# Altium PCB MB.PcbDoc
Units mil, origin at the board's own origin, x right, y up, seen from the top; angles counter-clockwise.
Board outline 4133.86 x 4921.26 mil, 4 copper layers (Digital Layer, nMO Layer, MO Layer, GND Layer), stack 39.843 mil thick; 61 components, 78 nets, 387 pads, 0 vias.
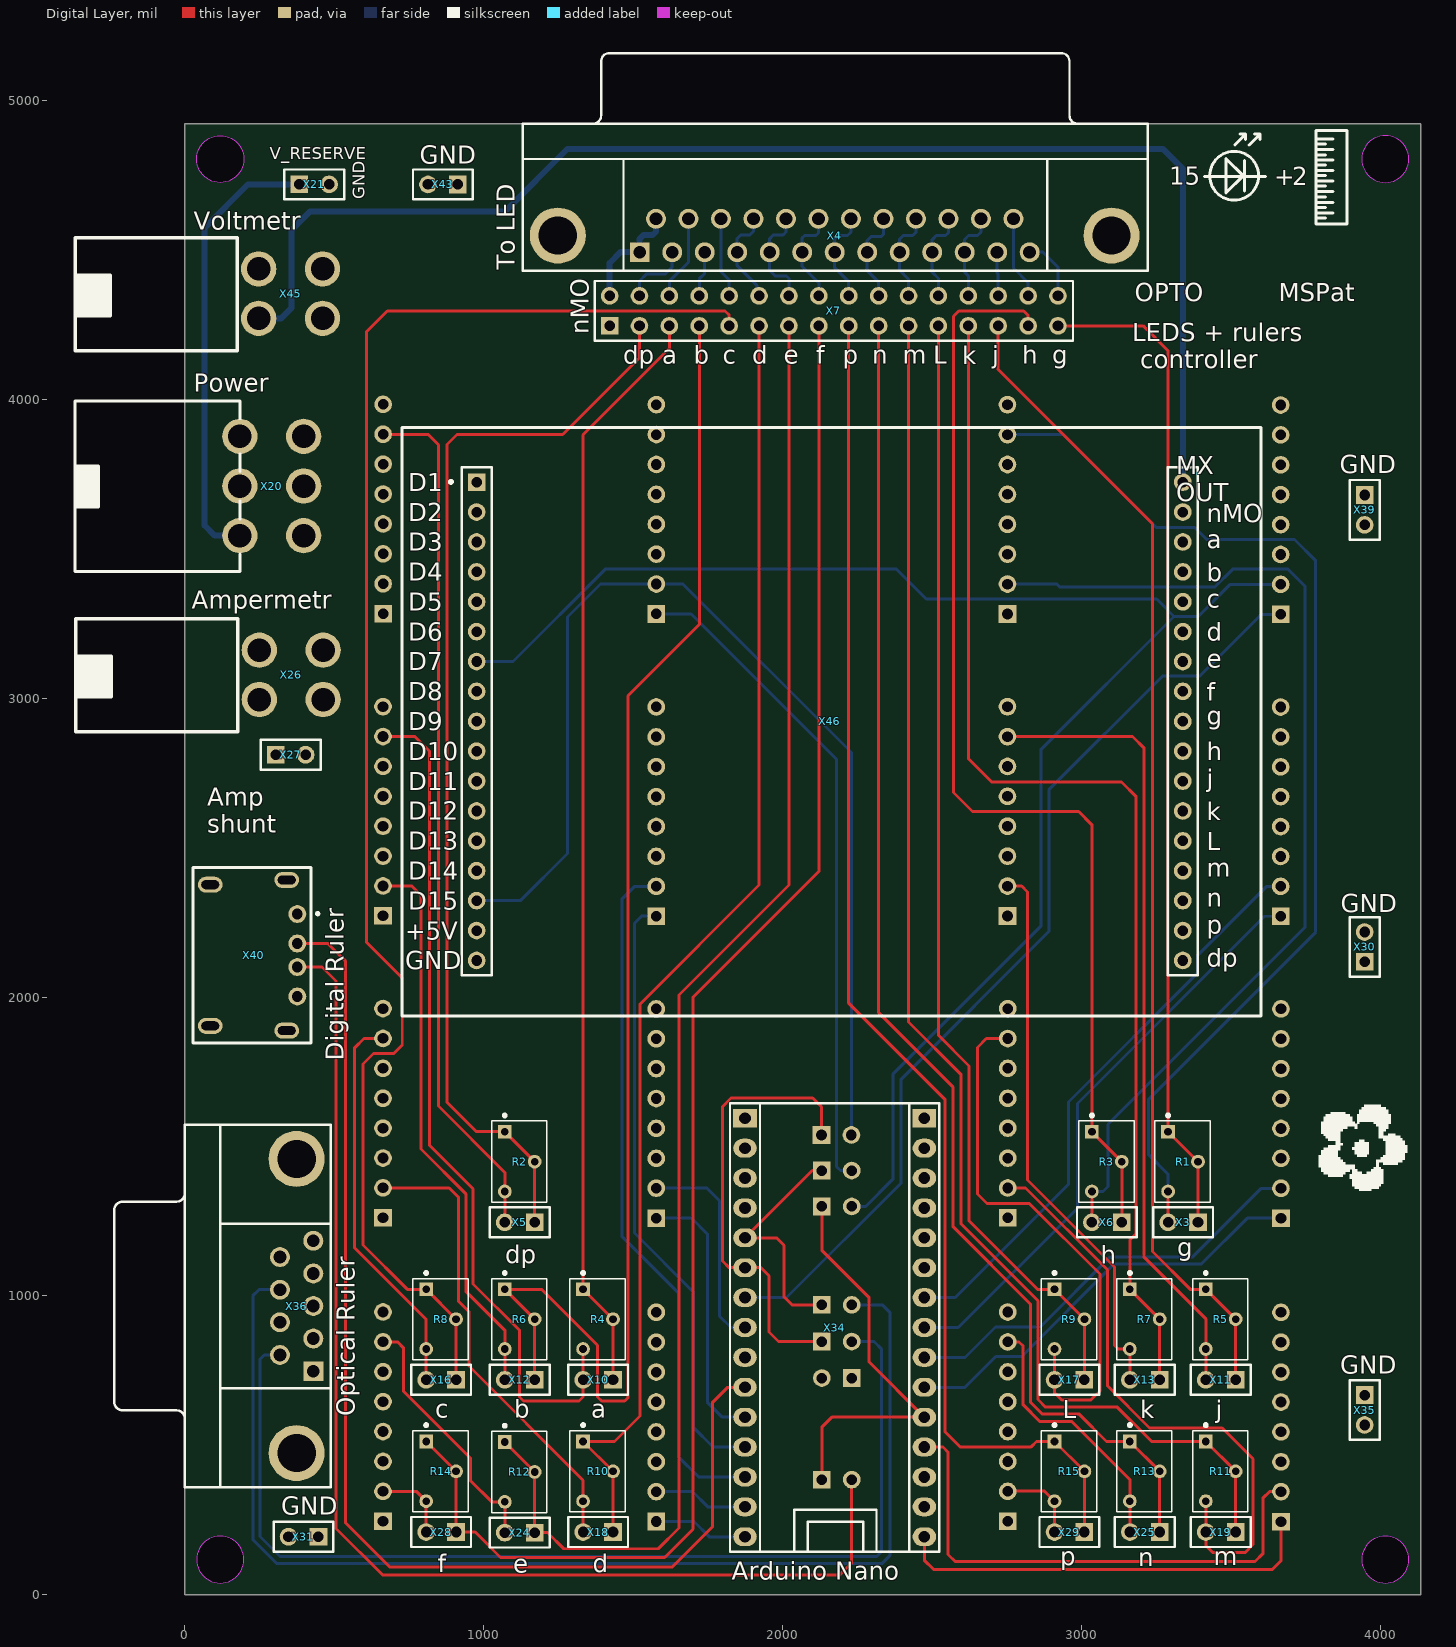
[diagram p0: Digital Layer view]
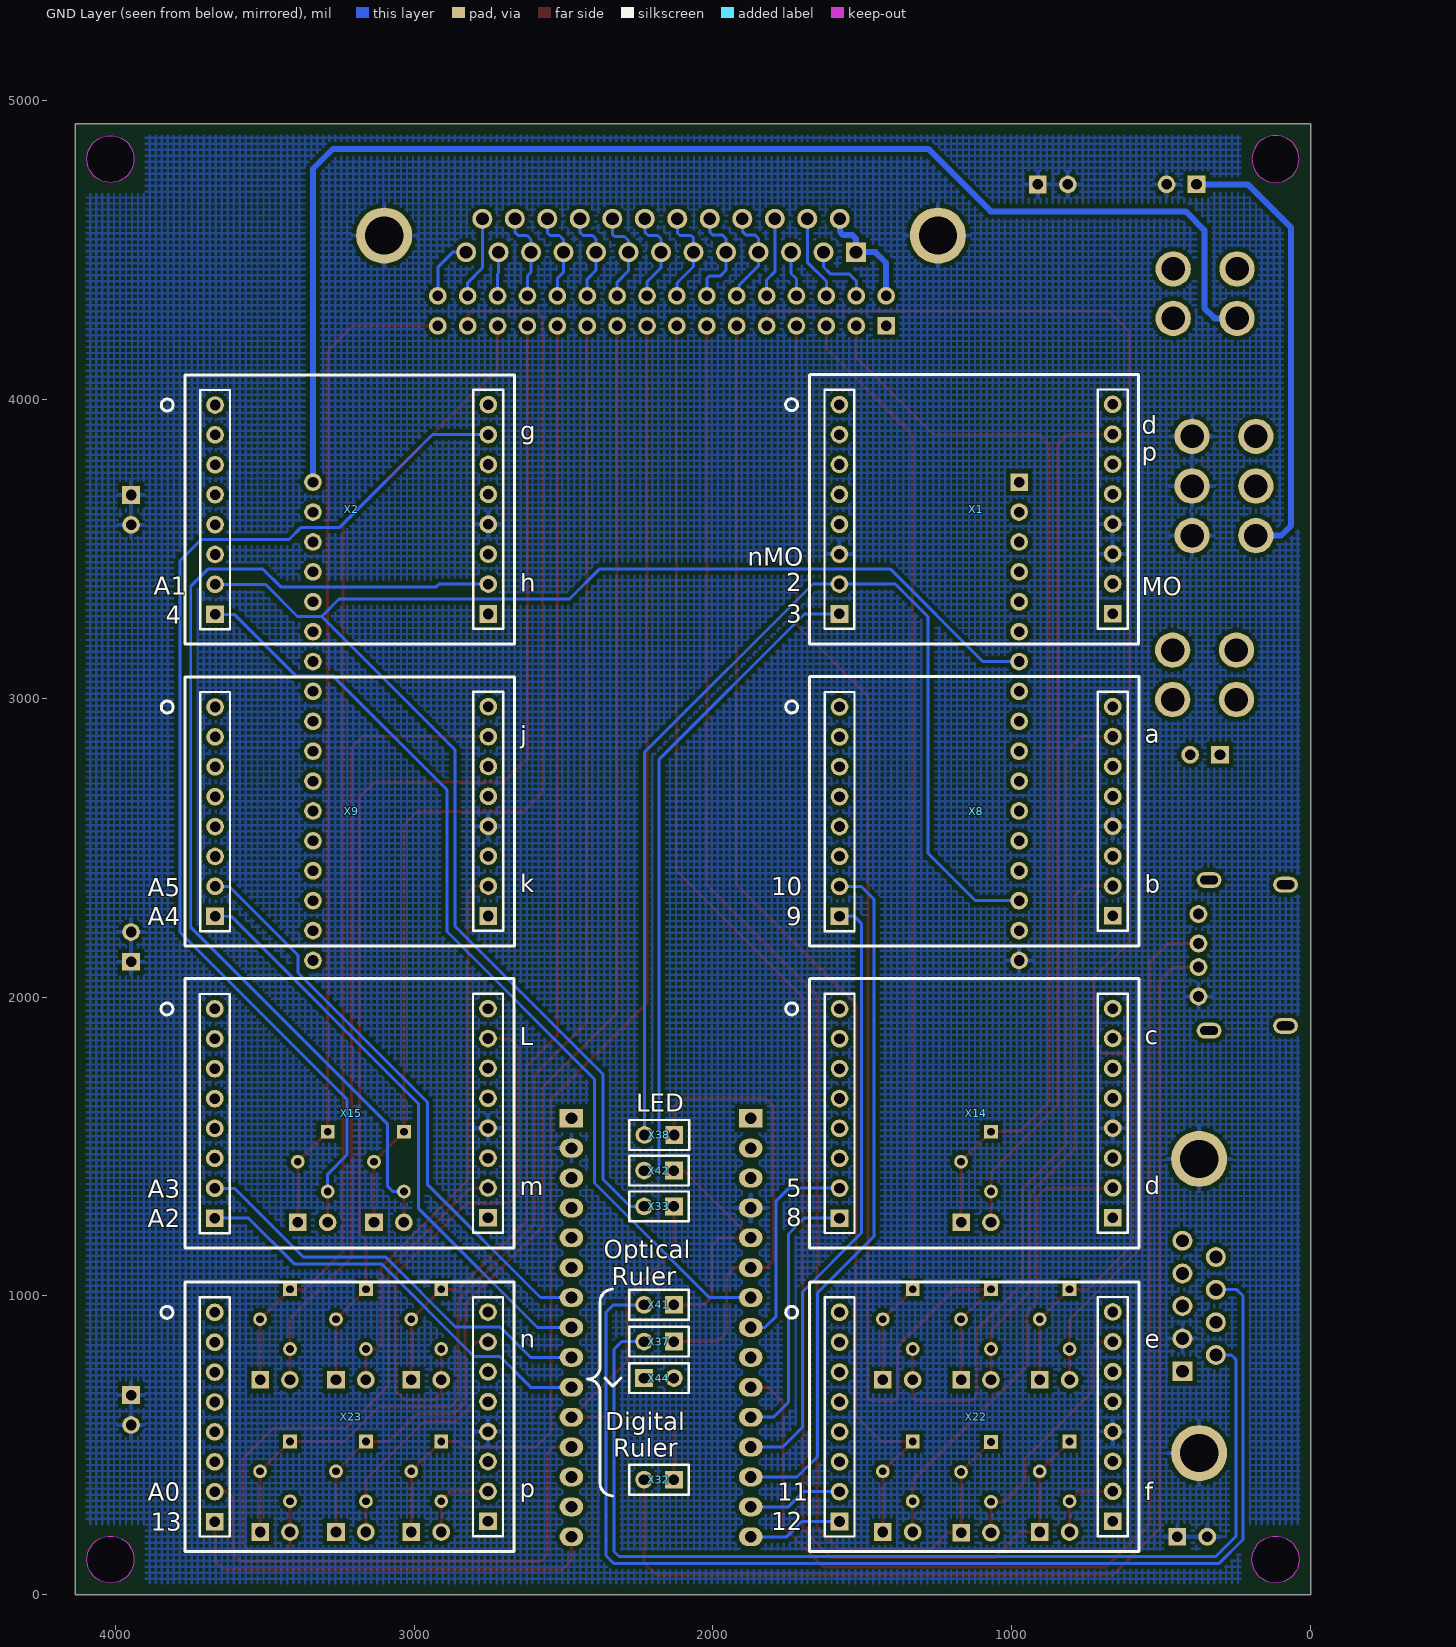
[diagram p1: GND Layer view, seen from below]
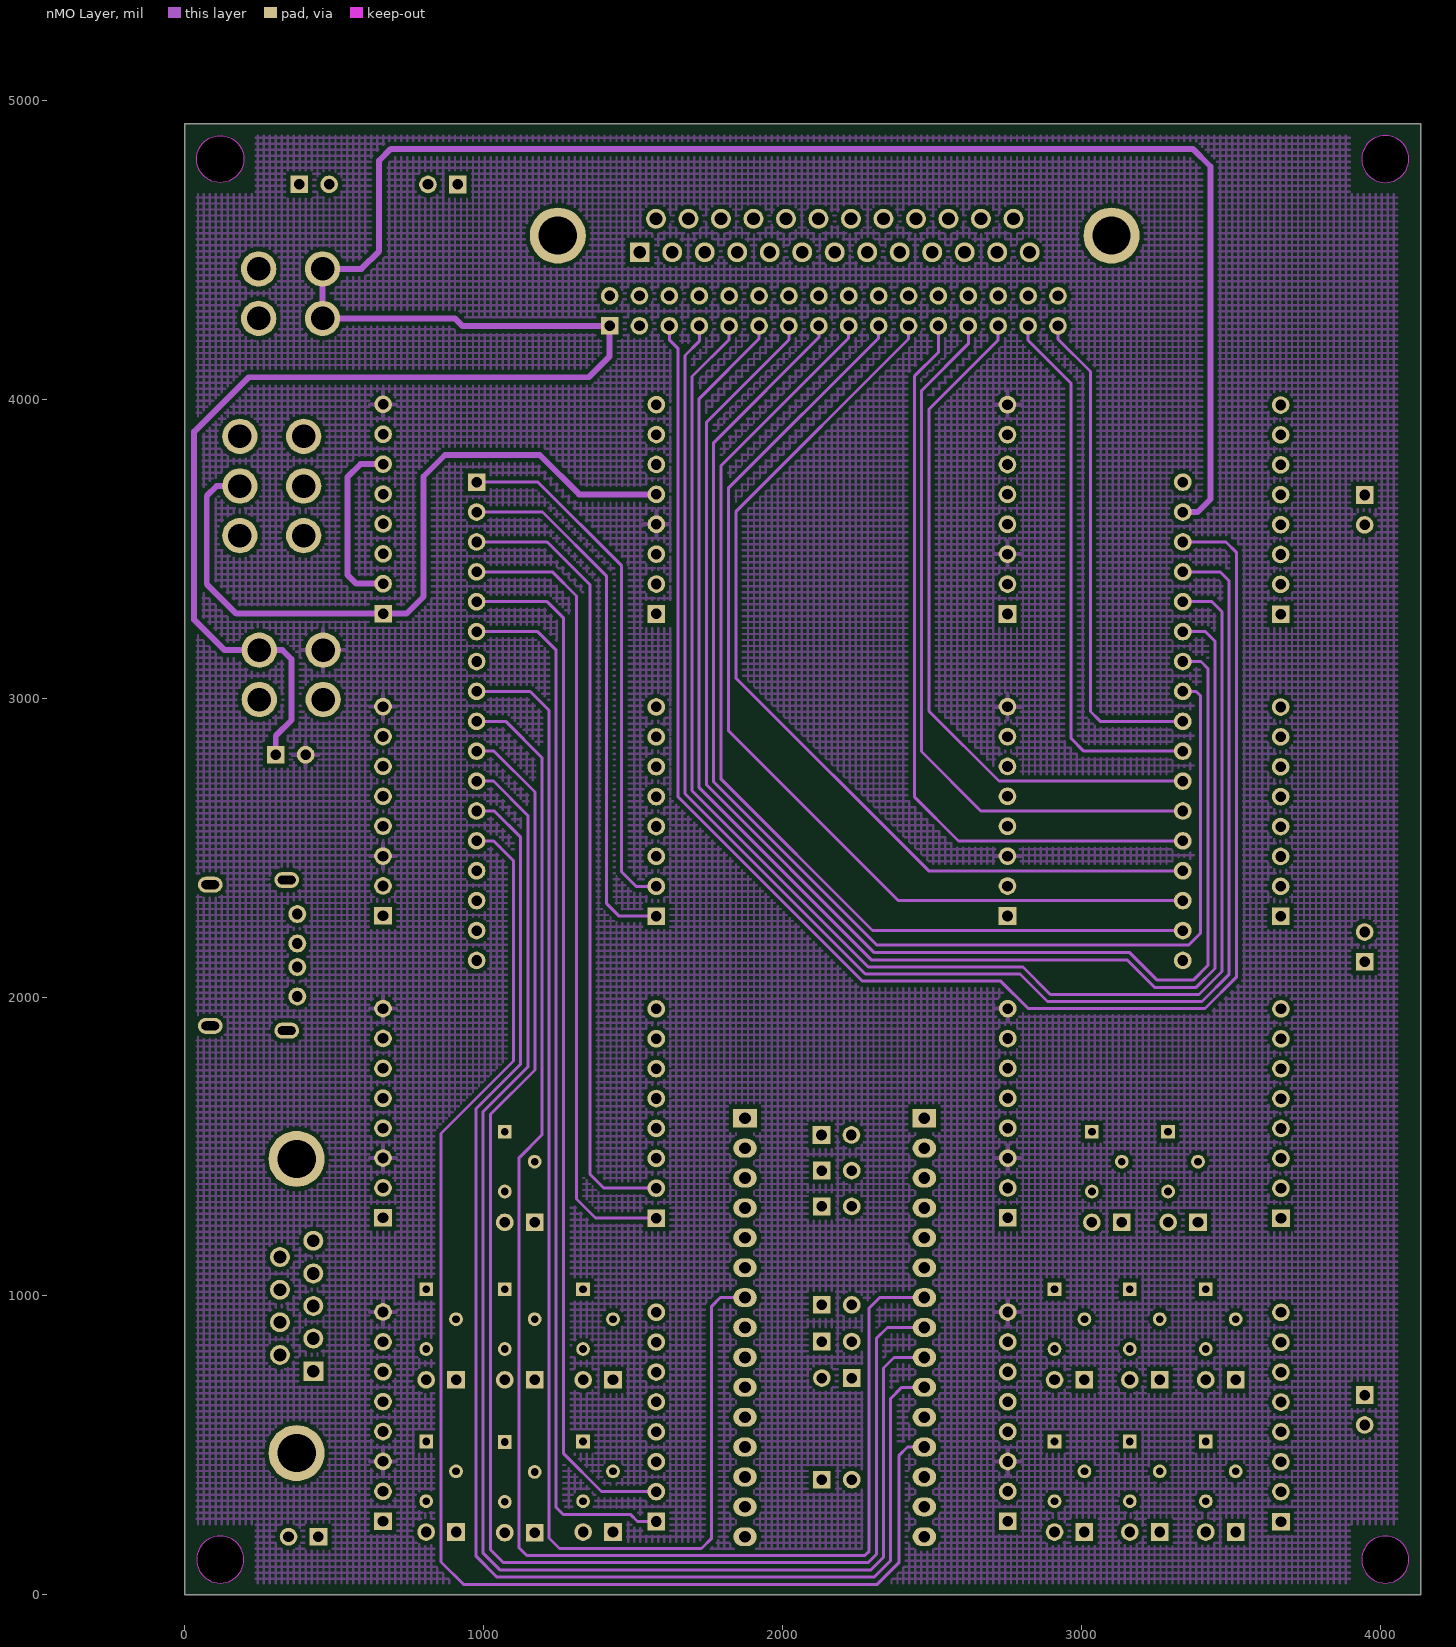
[diagram p2: nMO Layer]
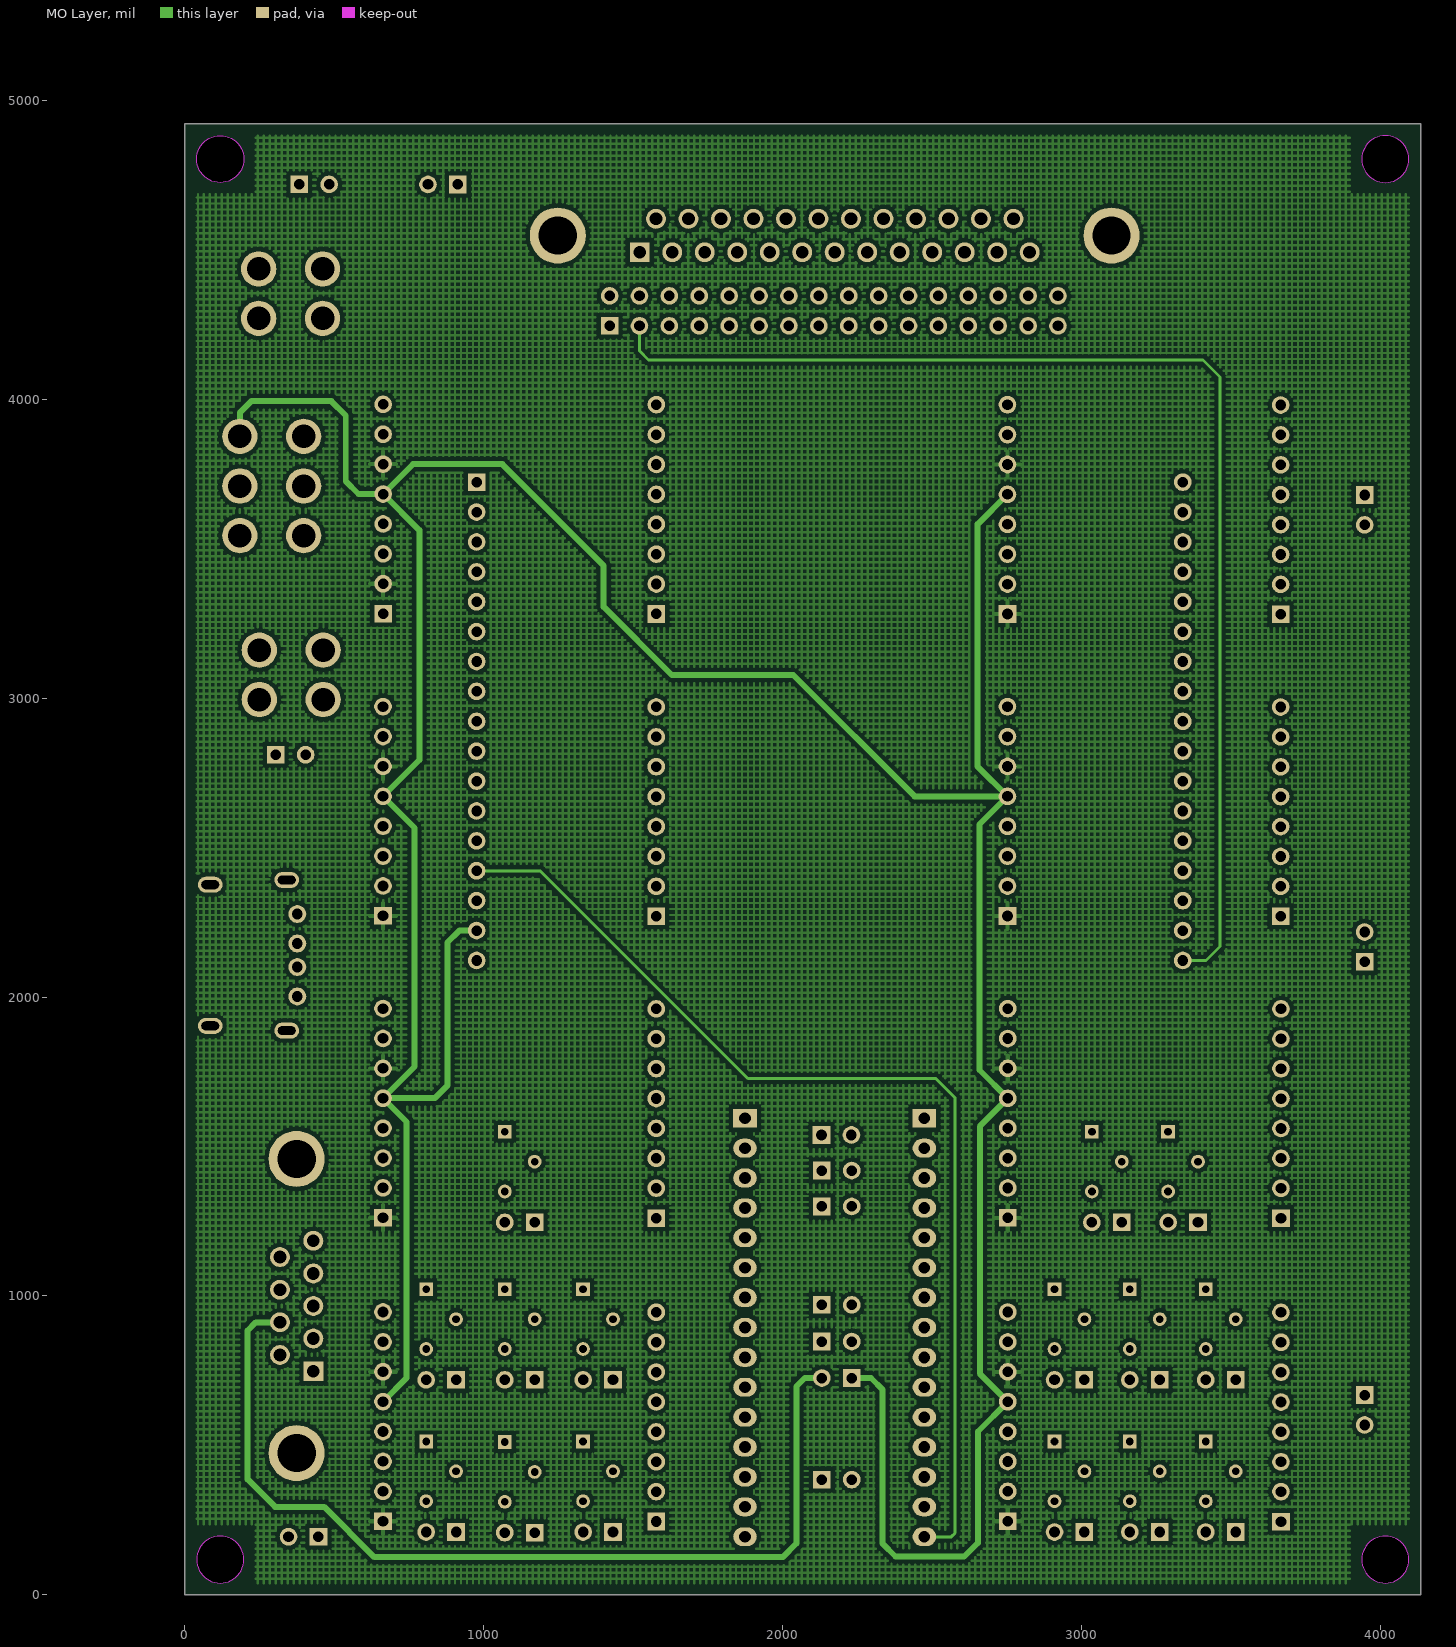
[diagram p3: MO Layer]

## Layer stack, top to bottom
Top Solder: solder mask 1, SM-001, Dk 4
Digital Layer: signal copper 0.7087
Dielectric 1: prepreg 4.5276, FR4 PR, Dk 4.2
nMO Layer: signal copper 0.7087
Dielectric 2: core 27.9528, FR4 Tg150, Dk 4.6
MO Layer: signal copper 0.7087
Dielectric 3: prepreg 4.5276, FR4 PR, Dk 4.2
GND Layer: signal copper 0.7087
Bottom Solder: solder mask 1, SM-001, Dk 4

## Board outline
0,4921.26 4133.86,4921.26 4133.86,0 0,0
cut-out: 3937.01,118.11 ccw(c4015.75,118.11) 4015.75,39.37 ccw(c4015.75,118.11) 4094.49,118.11 ccw(c4015.75,118.11) 4015.75,196.85 ccw(c4015.75,118.11)
cut-out: 3937.01,4803.15 ccw(c4015.75,4803.15) 4015.75,4724.41 ccw(c4015.75,4803.15) 4094.49,4803.15 ccw(c4015.75,4803.15) 4015.75,4881.89 ccw(c4015.75,4803.15)
cut-out: 118.11,4724.41 cw(c118.11,4803.15) 39.37,4803.15 cw(c118.11,4803.15) 118.11,4881.89 cw(c118.11,4803.15) 196.85,4803.15 cw(c118.11,4803.15)
cut-out: 39.37,118.11 ccw(c118.11,118.11) 118.11,39.37 ccw(c118.11,118.11) 196.85,118.11 ccw(c118.11,118.11) 118.11,196.85 ccw(c118.11,118.11)

## Design rules (kind name [scope] priority, off if disabled: settings)
AcuteAngle [All] p1: minimum=3.50000000000000E+0001 checktracksonly=FALSE
BoardOutlineClearance "BoardOutlineClearance 1" [All] p1: gap=9.84 ignorepadtopadclearanceinfootprint=FALSE except(0: Arc-SplitContinuation Track-SplitContinuation SMDPad-SplitContinuation THPad-SplitContinuation Via-SplitContinuation Fill-SplitContinuation Poly-SplitContinuation Region-SplitContinuation Text-SplitContinuation) // Milling
BoardOutlineClearance "BoardOutlineClearance 2" [All] p2: gap=15.75 ignorepadtopadclearanceinfootprint=FALSE except(0: Arc-SplitContinuation Track-SplitContinuation SMDPad-SplitContinuation THPad-SplitContinuation Via-SplitContinuation Fill-SplitContinuation Poly-SplitContinuation Region-SplitContinuation Text-SplitContinuation) // V-Cut
Clearance "Clearance 3 Oz" [All] p1: gap=13.78 ignorepadtopadclearanceinfootprint=FALSE except(9.84: Arc-Hole Track-Hole SMDPad-Hole THPad-Hole Via-Hole Fill-Hole Poly-Hole Region-Hole Text-Hole)
Clearance "Clearance 2 Oz" [All] p2: gap=11.81 ignorepadtopadclearanceinfootprint=FALSE except(9.84: Arc-Hole Track-Hole SMDPad-Hole THPad-Hole Via-Hole Fill-Hole Poly-Hole Region-Hole Text-Hole)
Clearance "Clearance-1 1 Oz" [All] p3: gap=7.87 ignorepadtopadclearanceinfootprint=FALSE except(9.84: Arc-Hole Track-Hole SMDPad-Hole THPad-Hole Via-Hole Fill-Hole Poly-Hole Region-Hole Text-Hole) // Standart
Clearance "Clearance-2 1 Oz" [All] p4: gap=5.91 ignorepadtopadclearanceinfootprint=FALSE except(7.87: Arc-Fill Arc-Poly Track-Fill Track-Poly SMDPad-Fill SMDPad-Poly THPad-Fill THPad-Poly Via-Fill Via-Poly Fill-Fill Fill-Poly Poly-Poly; 9.84: Arc-Hole Track-Hole SMDPad-Hole THPad-Hole Via-Hole Fill-Hole Poly-Hole Region-Hole Text-Hole) // Advance
Clearance "Clearance-1 1/2 Oz" [All] p5: gap=4.92 ignorepadtopadclearanceinfootprint=FALSE except(7.87: Arc-Fill Arc-Poly Track-Fill Track-Poly SMDPad-SMDPad SMDPad-Fill SMDPad-Poly THPad-Fill THPad-Poly Via-Fill Via-Poly Fill-Fill Fill-Poly Poly-Poly Poly-Region Poly-Text; 9.84: Arc-Hole Track-Hole SMDPad-Hole THPad-Hole Via-Hole Fill-Hole Poly-Hole Region-Hole Text-Hole) // Standart
Clearance "Clearance-2 1/2 Oz" [All] p6: gap=3.94 ignorepadtopadclearanceinfootprint=FALSE except(5.91: Arc-Fill Arc-Poly Track-Fill Track-Poly SMDPad-SMDPad SMDPad-Fill SMDPad-Poly THPad-Fill THPad-Poly Via-Fill Via-Poly Fill-Fill Fill-Poly Poly-Poly Poly-Region Poly-Text; 9.84: Arc-Hole Track-Hole SMDPad-Hole THPad-Hole Via-Hole Fill-Hole Poly-Hole Region-Hole Text-Hole) // Advance
DiffPairsRouting "DiffPairsRouting 1 Oz" [All] p1: maxlimit=10 minlimit=7.87 mostfreqgap=10 toplayer_minwidth=7.87 toplayer_maxwidth=15 toplayer_prefwidth=15 midlayer1_minwidth=7.87 midlayer1_maxwidth=15 midlayer1_prefwidth=15 midlayer2_minwidth=7.87 midlayer2_maxwidth=15 midlayer2_prefwidth=15 bottomlayer_minwidth=7.87 bottomlayer_maxwidth=15 bottomlayer_prefwidth=15 maxuncoupledlength=500
DiffPairsRouting "DiffPairsRouting 1/2 Oz" [All] p2: maxlimit=10 minlimit=3.94 mostfreqgap=10 toplayer_minwidth=3.94 toplayer_maxwidth=15 toplayer_prefwidth=15 midlayer1_minwidth=3.94 midlayer1_maxwidth=15 midlayer1_prefwidth=15 midlayer2_minwidth=3.94 midlayer2_maxwidth=15 midlayer2_prefwidth=15 bottomlayer_minwidth=3.94 bottomlayer_maxwidth=15 bottomlayer_prefwidth=15 maxuncoupledlength=500
HoleSize "Minimum HoleSize" [IsPad] p1: absolutevalues=TRUE maxlimit=232.28 minlimit=23.62 maxpercent=80.000 minpercent=20.000
HoleSize "Minimum HoleSize VIA 1" [IsVia] p2: absolutevalues=TRUE maxlimit=232.28 minlimit=11.81 maxpercent=80.000 minpercent=20.000 // Standart
HoleSize "Minimum HoleSize VIA 2" [IsVia] p3: absolutevalues=TRUE maxlimit=232.28 minlimit=7.87 maxpercent=80.000 minpercent=20.000 // Advance
HoleToHoleClearance Hole2HoleClearance [All] p1: gap=9.84 allowstackedmicrovias=FALSE
MinimumAnnularRing "Minimum AR VIA Standart" [IsVia] p1: minimumring=5.91
MinimumAnnularRing "Minimum AR PAD Standart" [IsPAD] p2: minimumring=7.87
MinimumAnnularRing "Minimum AR VIA Advance" [IsVia] p3: minimumring=3.94
MinimumAnnularRing "Minimum AR PAD Advance" [IsPAD] p4: minimumring=5.91
MinimumSolderMaskSliver "SolderMask Bridge Standart" [All] p1: minsoldermaskwidth=5.91 // All Masks
MinimumSolderMaskSliver "SolderMask Bridge Advance" [All] p2: minsoldermaskwidth=3.94 // Mask LDI
PlaneClearance "PlaneClearance 3 Oz" [All] p1: clearance=13.78
PlaneClearance "PlaneClearance 2 Oz" [All] p2: clearance=11.81
PlaneClearance "PlaneClearance 1 Oz" [All] p3: clearance=7.87
PlaneClearance "PlaneClearance-1 1/2 Oz" [All] p4: clearance=7.87 // Standart
PlaneClearance "PlaneClearance-2 1/2 Oz" [All] p5: clearance=5.91 // Advance
PlaneConnect "TermalConnect 3 Oz" [All] p1: planeconnectstyle=Relief reliefexpansion=7.87 reliefentries=4 reliefconductorwidth=13.78 reliefairgap=13.78 // Standart
PlaneConnect "TermalConnect 2 Oz" [All] p2: planeconnectstyle=Relief reliefexpansion=7.87 reliefentries=4 reliefconductorwidth=11.81 reliefairgap=11.81 // Standart
PlaneConnect "TermalConnect-1 1 Oz" [All] p3: planeconnectstyle=Relief reliefexpansion=7.87 reliefentries=4 reliefconductorwidth=7.87 reliefairgap=7.87 // Standart
PlaneConnect "TermalConnect-2 1 Oz" [All] p4: pad.planeconnectstyle=Relief pad.reliefexpansion=5.91 pad.reliefentries=4 pad.reliefconductorwidth=7.87 pad.reliefairgap=7.87 via.planeconnectstyle=Direct via.reliefexpansion=5.91 via.reliefentries=4 via.reliefconductorwidth=5.91 via.reliefairgap=5.91 // Advance
PlaneConnect "TermalConnect-1 1/2 Oz" [All] p5: planeconnectstyle=Relief reliefexpansion=7.87 reliefentries=4 reliefconductorwidth=7.87 reliefairgap=7.87 // Standart
PlaneConnect "TermalConnect-2 1/2 Oz" [All] p6: pad.planeconnectstyle=Relief pad.reliefexpansion=5.91 pad.reliefentries=4 pad.reliefconductorwidth=5.91 pad.reliefairgap=5.91 via.planeconnectstyle=Direct via.reliefexpansion=5.91 via.reliefentries=4 via.reliefconductorwidth=5.91 via.reliefairgap=5.91 // Advance
PolygonConnect "PolygonConnect 3 Oz" [All] p1: thpad.connectstyle=Relief thpad.reliefconductorwidth=13.78 thpad.reliefentries=4 thpad.polygonreliefangle="90 Angle" thpad.airgapwidth=13.78 smdpad.connectstyle=Relief smdpad.reliefconductorwidth=13.78 smdpad.reliefentries=4 smdpad.polygonreliefangle="90 Angle" smdpad.airgapwidth=13.78 via.connectstyle=Direct via.reliefconductorwidth=10 via.reliefentries=4 via.polygonreliefangle="90 Angle" via.airgapwidth=10
PolygonConnect "PolygonConnect 2 Oz" [All] p2: thpad.connectstyle=Relief thpad.reliefconductorwidth=11.81 thpad.reliefentries=4 thpad.polygonreliefangle="90 Angle" thpad.airgapwidth=11.81 smdpad.connectstyle=Relief smdpad.reliefconductorwidth=11.81 smdpad.reliefentries=4 smdpad.polygonreliefangle="90 Angle" smdpad.airgapwidth=11.81 via.connectstyle=Direct via.reliefconductorwidth=10 via.reliefentries=4 via.polygonreliefangle="90 Angle" via.airgapwidth=10
PolygonConnect "PolygonConnect-1 1 Oz" [All] p3: thpad.connectstyle=Relief thpad.reliefconductorwidth=7.87 thpad.reliefentries=4 thpad.polygonreliefangle="90 Angle" thpad.airgapwidth=7.87 smdpad.connectstyle=Relief smdpad.reliefconductorwidth=7.87 smdpad.reliefentries=4 smdpad.polygonreliefangle="90 Angle" smdpad.airgapwidth=7.87 via.connectstyle=Direct via.reliefconductorwidth=10 via.reliefentries=4 via.polygonreliefangle="90 Angle" via.airgapwidth=10 // Standart
PolygonConnect "PolygonConnect-2 1 Oz" [All] p4: thpad.connectstyle=Relief thpad.reliefconductorwidth=5.91 thpad.reliefentries=4 thpad.polygonreliefangle="90 Angle" thpad.airgapwidth=5.91 smdpad.connectstyle=Relief smdpad.reliefconductorwidth=5.91 smdpad.reliefentries=4 smdpad.polygonreliefangle="90 Angle" smdpad.airgapwidth=5.91 via.connectstyle=Direct via.reliefconductorwidth=10 via.reliefentries=4 via.polygonreliefangle="90 Angle" via.airgapwidth=10 // Advance
PolygonConnect "PolygonConnect-1 1/2 Oz" [All] p5: thpad.connectstyle=Relief thpad.reliefconductorwidth=5.91 thpad.reliefentries=4 thpad.polygonreliefangle="90 Angle" thpad.airgapwidth=7.87 smdpad.connectstyle=Relief smdpad.reliefconductorwidth=7.87 smdpad.reliefentries=4 smdpad.polygonreliefangle="90 Angle" smdpad.airgapwidth=7.87 via.connectstyle=Direct via.reliefconductorwidth=10 via.reliefentries=4 via.polygonreliefangle="90 Angle" via.airgapwidth=10 // Standart
PolygonConnect "PolygonConnect-2 1/2 Oz" [All] p6: thpad.connectstyle=Relief thpad.reliefconductorwidth=4.92 thpad.reliefentries=4 thpad.polygonreliefangle="90 Angle" thpad.airgapwidth=5.91 smdpad.connectstyle=Relief smdpad.reliefconductorwidth=4.92 smdpad.reliefentries=4 smdpad.polygonreliefangle="90 Angle" smdpad.airgapwidth=5.91 via.connectstyle=Direct via.reliefconductorwidth=10 via.reliefentries=4 via.polygonreliefangle="90 Angle" via.airgapwidth=10 // Advance
RoutingCorners [All] p1 off: cornerstyle=45-Degree minsetback=100 maxsetback=100
RoutingVias [All] p1: holewidth=11.81 width=23.62 viastyle="Through Hole" minholewidth=7.87 minwidth=15.75 maxholewidth=232.28 maxwidth=251.97
SilkToSilkClearance Silk2SilkClearance [All] p1 off: silktosilkclearance=5.91
SilkToSolderMaskClearance Silk2SolderMaskClearance [IsPad] p1 off: minsilkscreentomaskgap=5.91 clearancetoexposedcopper=TRUE
SolderMaskExpansion SolderMaskExpansion-1 [All] p1: expansion=1.97 istentingtop=FALSE // Standart
SolderMaskExpansion "SolderMaskExpansion LDI" [All] p2: expansion=0.98 istentingtop=FALSE // Advance
UnRoutedNet [All] p1: checkbadconnections=TRUE
Width "Width 3 Oz" [All] p1: maxlimit=20 minlimit=10 preferedwidth=10 checkconnectedcopper=TRUE
Width "Width 2 Oz" [All] p2: maxlimit=393.7 minlimit=10 preferedwidth=10 minimp=50.000000 maximp=50.000000 favimp=50.000000 checkconnectedcopper=TRUE
Width "Width 1 Oz" [All] p3: maxlimit=20 minlimit=10 preferedwidth=10 checkconnectedcopper=TRUE
Width "Width 1/2 Oz" [All] p4: maxlimit=20 minlimit=10 preferedwidth=10 checkconnectedcopper=TRUE
20 further rules are at their usual default settings.

## Components (designator, comment, footprint, x,y, rotation, side; value= is the part's Value field where it differs from the comment)
R1 "RES 3266W" "RES 3266W" 3289,1549.37 r270 top
R2 "RES 3266W" "RES 3266W" 1070,1549.37 r270 top
R3 "RES 3266W" "RES 3266W" 3034,1549.37 r270 top
R4 "RES 3266W" "RES 3266W" 1332,1022.37 r270 top
R5 "RES 3266W" "RES 3266W" 3415,1022.37 r270 top
R6 "RES 3266W" "RES 3266W" 1070,1022.37 r270 top
R7 "RES 3266W" "RES 3266W" 3161,1022.37 r270 top
R8 "RES 3266W" "RES 3266W" 807,1022.37 r270 top
R9 "RES 3266W" "RES 3266W" 2909,1022.37 r270 top
R10 "RES 3266W" "RES 3266W" 1332,513.37 r270 top
R11 "RES 3266W" "RES 3266W" 3415,513.37 r270 top
R12 "RES 3266W" "RES 3266W" 1070,511.37 r270 top
R13 "RES 3266W" "RES 3266W" 3161,513.37 r270 top
R14 "RES 3266W" "RES 3266W" 807,513.37 r270 top
R15 "RES 3266W" "RES 3266W" 2909,513.37 r270 top
X1 "MEZ_RELAY" MEZ_RELAY 1576.98,3981.6 r180 bottom
X2 "MEZ_RELAY" MEZ_RELAY 3665.62,3980.49 r180 bottom
X3 "GND" HDR1X2 3389,1246.37 r180 top
X4 "D Connector 25" DSUB1.385-2H25A 2173.62,4921.49 r0 top
X5 "GND" HDR1X2 1170,1246.37 r180 top
X6 "GND" HDR1X2 3134,1246.37 r180 top
X7 "Header 16X2" HDR2X16 1420.62,4245.49 r0 top
X8 "MEZ_RELAY" MEZ_RELAY 1576.62,2970.49 r180 bottom
X9 "MEZ_RELAY" MEZ_RELAY 3665.62,2970.24 r180 bottom
X10 "Header 2" HDR1X2 1432,719.37 r180 top
X11 "Header 2" HDR1X2 3515,719.37 r180 top
X12 "Header 2" HDR1X2 1170,719.37 r180 top
X13 "Header 2" HDR1X2 3261,719.37 r180 top
X14 "MEZ_RELAY" MEZ_RELAY 1576.62,1960.49 r180 bottom
X15 "MEZ_RELAY" MEZ_RELAY 3666.62,1960.24 r180 bottom
X16 "Header 2" HDR1X2 907,719.37 r180 top
X17 "GND" HDR1X2 3009,719.37 r180 top
X18 "Header 2" HDR1X2 1432,210.37 r180 top
X19 "GND" HDR1X2 3515,210.37 r180 top
X20 "Power" POWER 183.8,3875.49 r90 top
X21 "Header 2" HDR1X2 382.62,4718.49 r0 top
X22 "MEZ_RELAY" MEZ_RELAY 1576.62,945.49 r180 bottom
X23 "MEZ_RELAY" MEZ_RELAY 3666.62,945.24 r180 bottom
X24 "GND" HDR1X2 1170,208.37 r180 top
X25 "GND" HDR1X2 3261,210.37 r180 top
X26 "Ampermetr" AMP_VOLTMETER 462.31,3160.49 r270 top
X27 "Header 2" HDR1X2 303.8,2810.49 r0 top
X28 "GND" HDR1X2 907,210.37 r180 top
X29 "GND" HDR1X2 3009,210.37 r180 top
X30 "GND" HDR1X2 3946.62,2117.49 r90 top
X31 "GND" HDR1X2 446.62,194.49 r180 top
X32 "Digit_rul" HDR1X2 2130.62,385.49 r0 bottom
X33 "Relay" HDR1X2 2130.62,1299.49 r0 bottom
X34 "Arduino Nano" PCBComponent_1 2473.62,1594.49 r90 top
X35 "GND" HDR1X2 3946.62,668.49 r270 top
X36 "D Connector 9" DSUB1.385-2H9 -0.39,966.42 r90 top
X37 "Optic_rul" HDR1X2 2130.62,847.49 r0 bottom
X38 "Relay" HDR1X2 2129.62,1538.49 r0 bottom
X39 "GND" HDR1X2 3946.62,3679.49 r270 top
X40 "USB" USB 376,2277.54 r270 top
X41 "Optic_ruler" HDR1X2 2130.62,970.35 r0 bottom
X42 "Relay" HDR1X2 2130.62,1419.49 r0 bottom
X43 "GND" HDR1X2 913,4718.37 r180 top
X44 "Optic_rul" HDR1X2 2230.62,725.37 r180 bottom
X45 "Voltmetr" AMP_VOLTMETR 460.3,4435.72 r270 top
X46 "MX_MEZ" MX_MEZ 2157,2922.37 r0 top

## Footprints (in the part's own frame and the unit in brackets; to place one, negate y for a bottom-side part, rotate by r counter-clockwise, add the part's x,y. Pads: shape width x height; smd on the part's side, far side on the other; paste and mask are expansions set on the pad)
AMP_VOLTMETER [mm] "AMP_VOLTMETER"
  round 3 hole 2: 1(0,0) 2(0,-5.423) 3(4.2,-5.423) 4(4.2,0)
  silkscreen extent -2.66,-21 6.94,-7.25
AMP_VOLTMETR [mm]
  round 3 hole 2: 1(0,0) 2(0,-5.423) 3(4.2,-5.423) 4(4.2,0)
  silkscreen extent -2.66,-21 6.94,-7.25
DSUB1.385-2H9 [mm] "Connector; D Subminiature; 9 Position; Right Angle; Pitch 1.385 mm"
  rect 1.69x1.69 hole 1.09: 1(-5.54,-10.92)
  round 1.69 hole 1.09: 2(-2.77,-10.92) 3(0,-10.92) 4(2.77,-10.92) 5(5.54,-10.92) 6(-4.155,-8.08) 8(1.385,-8.08) 9(4.155,-8.08)
  round 1.69 hole 1.09 mask+0.102: 7(-1.385,-8.08)
  round 4.76 hole 3.26: 10(-12.495,-9.5) 11(12.495,-9.5)
  silkscreen extent -15.4,-12.4 15.4,6
DSUB1.385-2H25A [mm] "Connector; D Subminiature; 25 Position; Right Angle; Pitch 1.385 mm"
  rect 1.69x1.69 hole 1.09: 1(-16.566,-10.92)
  round 1.69 hole 1.09: 2(-13.805,-10.92) 3(-11.044,-10.92) 4(-8.283,-10.92) 5(-5.522,-10.92) 6(-2.761,-10.92) 7(0,-10.92) 8(2.761,-10.92) 9(5.522,-10.92) 10(8.283,-10.92) 11(11.044,-10.92) 12(13.805,-10.92) 13(16.566,-10.92) 14(-15.185,-8.08) 15(-12.424,-8.08) 16(-9.663,-8.08) 17(-6.902,-8.08) 18(-4.141,-8.08) 19(-1.38,-8.08) 20(1.381,-8.08) 21(4.142,-8.08) 22(6.903,-8.08) 23(9.664,-8.08) 24(12.425,-8.08) 25(15.186,-8.08)
  round 4.76 hole 3.26: 26(-23.526,-9.5) 27(23.526,-9.5)
  silkscreen extent -26.5,-12.5 26.6,6
HDR1X2 [mm] "Connector; Header; 2 Position"
  rect 1.5x1.5 hole 0.9: 1(0,0)
  round 1.5 hole 0.9: 2(2.54,0)
  silkscreen extent -1.27,-1.27 3.81,1.27
HDR2X16 [mm] "Connector; Header; 16x2 Position"
  rect 1.5x1.5 hole 0.9: 1(0,0)
  round 1.5 hole 0.9: 2(0,2.54) 3(2.54,0) 4(2.54,2.54) 5(5.08,0) 6(5.08,2.54) 7(7.62,0) 8(7.62,2.54) 9(10.16,0) 10(10.16,2.54) 11(12.7,0) 12(12.7,2.54) 13(15.24,0) 14(15.24,2.54) 15(17.78,0) 16(17.78,2.54) 17(20.32,0) 18(20.32,2.54) 19(22.86,0) 20(22.86,2.54) 21(25.4,0) 22(25.4,2.54) 23(27.94,0) 24(27.94,2.54) 25(30.48,0) 26(30.48,2.54) 27(33.02,0) 28(33.02,2.54) 29(35.56,0) 30(35.56,2.54) 31(38.1,0) 32(38.1,2.54)
  silkscreen extent -1.27,-1.27 39.37,3.81
MEZ_RELAY [mm] "мезонин реле"
  round 1.5 hole 0.9: 1(0,0) 2(0,-2.54) 3(0,-5.08) 4(0,-7.62) 5(0,-10.16) 6(0,-12.7) 7(0,-15.24) 10(23.216,-15.215) 11(23.216,-12.675) 12(23.216,-10.135) 14(23.216,-5.055) 15(23.216,-2.515) 16(23.216,0.025)
  rect 1.5x1.5 hole 0.9: 8(0,-17.78) 9(23.216,-17.755)
  round 1.5 hole 0.9 mask+0.102: 13(23.216,-7.595)
  silkscreen extent -4.57,-20.32 25.43,2.57
MX_MEZ [mm]
  rect 1.5x1.5 hole 0.9: 1(-30,20.32)
  round 1.5 hole 0.9: 2(-30,17.78) 3(-30,15.24) 4(-30,12.7) 5(-30,10.16) 6(-30,7.62) 7(-30,5.08) 8(-30,2.54) 9(-30,0) 10(-30,-2.54) 11(-30,-5.08) 12(-30,-7.62) 13(-30,-10.16) 14(-30,-12.7) 15(-30,-15.24) 16(-30,-17.78) 17(-30,-20.32) 18(30,-20.32) 19(30,-17.78) 20(30,-15.24) 21(30,-12.7) 22(30,-10.16) 23(30,-7.62) 24(30,-5.08) 25(30,-2.54) 26(30,0) 27(30,2.54) 28(30,5.08) 29(30,7.62) 30(30,10.16) 31(30,12.7) 32(30,15.24) 33(30,17.78) 34(30,20.32)
  silkscreen extent -36.35,-25.05 36.65,24.95
PCBComponent_1 [mm]
  rect 1.6x2 hole 1: 1(0,15.24) 30(0,0)
  oval 1.6x2 hole 1: 2(-2.54,15.24) 3(-5.08,15.24) 4(-7.62,15.24) 5(-10.16,15.24) 6(-12.7,15.24) 7(-15.24,15.24) 8(-17.78,15.24) 9(-20.32,15.24) 10(-22.86,15.24) 11(-25.4,15.24) 12(-27.94,15.24) 13(-30.48,15.24) 14(-33.02,15.24) 15(-35.56,15.24) 16(-35.56,0) 17(-33.02,0) 18(-30.48,0) 19(-27.94,0) 20(-25.4,0) 21(-22.86,0) 22(-20.32,0) 23(-17.78,0) 24(-15.24,0) 25(-12.7,0) 26(-10.16,0) 27(-7.62,0) 28(-5.08,0) 29(-2.54,0)
  silkscreen extent -36.83,-1.27 1.27,16.51
POWER [mm] "POWER"
  round 3 hole 2 mask+0.102: 1(0,0)
  round 3 hole 2: 2(-4.217,0) 3(-8.435,0) 4(0,-5.422) 5(-4.217,-5.422) 6(-8.435,-5.422)
  silkscreen extent -11.5,0 3,14
"RES 3266W" [mm]
  rect 1.168x1.168 hole 0.66: 1(0,0)
  round 1.168 hole 0.66: 2(2.54,2.54) 3(5.08,0)
  silkscreen extent -1.48,-1.12 5.99,3.58
USB [mm]
  round 1.52 hole 0.92: 1(0,0) 2(2.5,0) 3(4.5,0) 4(7,0)
  oval 1.35x2.1 hole 1.5 slot 0.75 at 0 deg: 5(-2.9,-0.9) 6(-2.5,-7.4) 7(9.5,-7.4) 8(9.9,-0.9)
  silkscreen extent -3.94,-8.87 10.94,1.83

## Part data
X3 X5 X6 X17 X19 X24 X25 X28 X29 X30 X31 X32 X33 X35 X37 X38 X39 X41 X42 X43 X44: library part "Header 2", "Header, 2-Pin", LatestRevisionDate=17-Jul-2002, LatestRevisionNote="Re-released for DXP Platform.", Publisher="Altium Limited"
X4: "Receptacle Assembly, 25 Position, Right Angle", PackageDocument=U, DatasheetDocument=19-Mar-1999, Gender=Receptacle, LatestRevisionDate=17-Jul-2002, LatestRevisionNote="Re-released for DXP Platform.", Orientation="Right Angle", PackageReference=787202, Positions=25, Published=15-Jun-2001, Publisher="Altium Limited"
X7: "Header, 16-Pin, Dual row", LatestRevisionDate=17-Jul-2002, LatestRevisionNote="Re-released for DXP Platform.", Publisher="Altium Limited"
X10 X11 X12 X13 X16 X18 X21 X27: "Header, 2-Pin", LatestRevisionDate=17-Jul-2002, LatestRevisionNote="Re-released for DXP Platform.", Publisher="Altium Limited"
X20: library part POWER
X26 X45: library part AMP_VOLTMETR
X34: library part Component_1
X36: "Receptacle Assembly, 9 Position, Right Angle", PackageDocument=O, DatasheetDocument=1-Sep-1999, Gender=Receptacle, LatestRevisionDate=17-Jul-2002, LatestRevisionNote="Re-released for DXP Platform.", Orientation="Right Angle", PackageReference=788750, Positions=9, Published=15-Jun-2001, Publisher="Altium Limited"

## Nets (pads, with @x,y where several pads share a name; then routed paths per layer and width w, separated by ;. In a path a pad name is that pad's centre, name@x,y a point inside that pad or via, vN(x,y) a via of type N, cw(c..) or ccw(c..) an arc to the next point about the centre after c; other vN are vias at no path point)
\M\O\: X1.5 X1.16 X2.11 X2.16 X8.11 X8.16 X9.11 X9.16 X14.11 X14.16 X15.11 X15.16 X22.11 X22.16 X23.11 X23.16 X26.1 X27.2
\M\O\_00: X4.1 X4.14 X7.2 | length 377.6
  GND Layer w20: X7.2 1420.62,4455.49 1456.7,4491.57 X4.1 1521.42,4536.28 1533.62,4548.49 1563.62,4548.49 1575.77,4560.63 X4.14
\M\O\_0: X7.1 X26.2 X27.1 X45.1 X45.4 X46.33 | length 8646.3
  nMO Layer w20: X27.1 303.8,2873.67 356.62,2926.49 356.62,3130.49 326.62,3160.49 X26.2 132.62,3160.49 31,3262.11 31,3891.37 213,4073.37 1351,4073.37 1420.62,4142.99 X7.1 927.88,4245.49 903,4270.37 X45.4 X45.1 590.35,4435.72 650,4495.37 650,4798.37 689,4837.37 3372,4837.37 3431,4778.37 3431,3665.37 3388,3622.37 X46.33
a: R4.3 X8.15 X10.2 | length 2845
  Digital Layer w10: X8.15 768.88,2871.49 817.62,2822.75 817.62,1504.75 964,1358.37 964,1040.37 1119,885.37 1119,662.37 1133,648.37 1318,648.37 1332,662.37 X10.2 R4.3
A0: X23.7 X34.19 X46.13 | length 6402.6
  Digital Layer w10: X34.19 2473.68,494.54 2535.83,494.54 2553,477.37 2553,135.11 2576.74,111.37 3580,111.37 3606,137.37 3606,323.37 3627.87,345.24 X23.7
  nMO Layer w10: X46.13 1033,2522.37 1099.41,2455.96 1099.41,1785.67 857,1543.26 857,110.37 932,35.37 2316,35.37 2388,107.37 2388,465.37 2417.12,494.49 X34.19
A1: X32.1 X33.1 X34.20 | length 1379.5
  Digital Layer w10: X32.1 2130.62,560.99 2164.12,594.49 X34.20 2289,779.11 2289,994.37 2130.62,1152.75 X33.1
A1_relay: X2.7 X33.2 X46.7 | length 5376.2
  GND Layer w10: X46.7 1097.37,3122.37 1407.37,3432.37 2379,3432.37 2480,3331.37 3251,3331.37 3309,3273.37 ; X33.2 2277.12,1299.49 2368,1390.37 2368,1741.37 2863,2236.37 2863,2827.37 3309,3273.37 ; X2.7 3497.22,3380.49 3390.1,3273.37 3309,3273.37
A1_ruler: X32.2 X40.3 | length 4064.2
  Digital Layer w10: X40.3 458.74,2100.37 505.62,2053.49 505.62,222.49 660.74,67.37 2191,67.37 2230.62,106.99 X32.2
A2: X15.8 X34.21 X46.12 | length 6186.8
  nMO Layer w10: X46.12 1035,2622.37 1123.19,2534.18 1123.19,1775.82 974.13,1626.76 974.13,129.24 1044,59.37 2305,59.37 2361,115.37 2361,657.37 2398.12,694.49 X34.21
  GND Layer w10: X34.21 2609.62,694.49 2712.62,797.49 2799.12,797.49 3109,1107.37 3401,1107.37 3553.87,1260.24 X15.8
A3: X15.7 X34.22 X46.11 | length 6339.8
  nMO Layer w10: X46.11 1032,2722.37 1146.97,2607.4 1146.97,1765.97 997.91,1616.91 997.91,139.46 1053.34,84.03 2295.29,84.03 2336.78,125.52 2336.78,759.15 2372.12,794.49 X34.22
  GND Layer w10: X34.22 2609.62,794.49 2711.62,896.49 2861.12,896.49 3095.78,1131.15 3371.78,1131.15 3600.87,1360.24 X15.7
A4: X9.8 X34.23 X46.10 | length 7033.2
  nMO Layer w10: X46.10 1034,2822.37 1170.75,2685.62 1170.75,1756.12 1021.69,1607.06 1021.69,151.68 1065.56,107.81 2285.44,107.81 2313,135.37 2313,857.37 2350.12,894.49 X34.23
  GND Layer w10: X34.23 2586.62,894.49 2985.62,1293.49 2985.62,1643.99 3611.87,2270.24 X9.8
A5: X9.7 X34.24 X46.9 | length 7101.1
  nMO Layer w10: X46.9 1073,2922.37 1194.53,2800.84 1194.53,1538.9 1118.31,1462.68 1118.31,157.06 1143.78,131.59 2274.22,131.59 2289,146.37 2289,959.37 2324.12,994.49 X34.24
  GND Layer w10: X34.24 2576.62,994.49 2955.62,1373.49 2955.62,1648.99 3388.1,2081.47 3388.1,2139.47 3618.87,2370.24 X9.7
a_00: X4.15 X7.6 | length 284.3
  GND Layer w10: X7.6 1620.62,4394.49 1684.47,4458.33 X4.15
a_0: R4.1 R4.2 X7.5 X10.1 X46.32 | length 9094.5
  Digital Layer w10: X10.1 R4.2 R4.1 1332,3880.87 1620.62,4169.49 X7.5
  nMO Layer w10: X7.5 1620.62,4198.75 1648.88,4170.49 1648.88,2670.6 2266.45,2053.03 2729.14,2053.03 2820.92,1961.25 3412.4,1961.25 3517.12,2065.97 3517.12,3488.25 3483,3522.37 X46.32
b: R6.3 X8.10 X12.2 | length 1877.2
  Digital Layer w10: X8.10 758.88,2371.49 790,2340.37 790,1491.37 939.78,1341.59 939.78,1015.59 1070,885.37 R6.3 X12.2
b_00: X4.3 X7.8 | length 153.6
  GND Layer w10: X7.8 1720.62,4402.49 1738.82,4420.69 X4.3
b_0: R6.1 R6.2 X7.7 X12.1 X46.31 | length 9917.4
  Digital Layer w10: X12.1 R6.2 R6.1 1193,1022.37 1380.31,835.06 1380.31,662.06 1394,648.37 1471,648.37 1482,659.37 1482,1221.37 1482,3007.87 1720.62,3246.49 X7.7
  nMO Layer w10: X7.7 1720.62,4193.99 1672.66,4146.03 1672.66,2680.45 2276.3,2076.81 2793.54,2076.81 2885.31,1985.03 3402.55,1985.03 3493.34,2075.82 3493.34,3392.03 3463,3422.37 X46.31
c: R8.3 X14.15 X16.2 | length 1317.5
  Digital Layer w10: X14.15 599.12,1861.49 568,1830.37 568,1160.37 807,921.37 R8.3 X16.2
c_00: X4.16 X7.10 | length 269.3
  GND Layer w10: X4.16 1793.17,4425.94 1820.62,4398.49 X7.10
c_0: R8.1 R8.2 X7.9 X16.1 X46.30 | length 10141.4
  Digital Layer w10: X16.1 R8.2 R8.1 744,1022.37 596,1170.37 596,1776.37 631,1811.37 698.62,1811.37 727,1839.75 727,2063.37 608,2182.37 608,4226.37 677,4295.37 1807,4295.37 1820.62,4281.75 X7.9
  nMO Layer w10: X7.9 1820.62,4199.99 1696.44,4075.81 1696.44,2690.3 2286.15,2100.59 2803.39,2100.59 2895.16,2008.81 3392.7,2008.81 3469.56,2085.67 3469.56,3288.81 3436,3322.37 X46.30
d: R10.3 X14.10 X18.2 | length 1558
  Digital Layer w10: X14.10 883.88,1361.49 916,1329.37 916,981.37 950,947.37 950,765.37 1332,383.37 R10.3 X18.2
D2: X34.5 X41.1 X42.1 | length 801
  Digital Layer w10: X41.1 2030.65,970.35 2004,996.99 2004,1169.37 1978.88,1194.49 X34.5 2098.62,1419.49 X42.1
D2_relay: X1.8 X42.2 | length 2223.4
  GND Layer w10: X1.8 1693.77,3281.6 2180,2795.37 2180,2769.11 2180,1432.37 2192.88,1419.49 X42.2
D2_ruler: X36.8 X41.2 | length 4041.1
  GND Layer w10: X36.8 247.57,1020.94 227.22,1000.59 227.22,185.52 308.15,104.59 2331.22,104.59 2358,131.37 2358,945.37 2333.02,970.35 X41.2
D3: X34.6 X37.1 X38.1 | length 1520.7
  Digital Layer w10: X38.1 2129.62,1632.75 2100,1662.37 1827,1662.37 1798,1633.37 1798,1117.37 1820.88,1094.49 X34.6 1926.88,1094.49 1954,1067.37 1954,879.37 1985.88,847.49 X37.1
D3_relay: X1.7 X38.2 X46.15 | length 3668.6
  GND Layer w10: X46.15 1122,2322.37 1280,2480.37 1280,3271.37 1390.23,3381.6 X1.7 1665.77,3381.6 2229.62,2817.75 X38.2
D3_ruler: X36.6 X37.2 | length 3567.7
  GND Layer w10: X36.6 265.46,802.83 251,788.37 251,195.37 318,128.37 2314,128.37 2331,145.37 2331,821.37 2304.88,847.49 X37.2
D4: X2.8 X34.7 X46.8 | length 7729.6
  nMO Layer w10: X46.8 1155,3022.37 1218.31,2959.06 1218.31,190.06 1253,155.37 1728,155.37 1762,189.37 1762,965.37 1791.12,994.49 X34.7
  GND Layer w10: X34.7 2012.62,994.49 2396,1377.87 2396,1725.37 2890,2219.37 2890,2693.37 3270,3073.37 3394,3073.37 3601.12,3280.49 X2.8
D5: X14.7 X34.8 X46.3 | length 3367.5
  nMO Layer w10: X46.3 1212,3522.37 1355,3379.37 1355,1407.37 1401.88,1360.49 X14.7
  GND Layer w10: X14.7 1746.62,1360.49 1788.62,1318.49 1788.62,932.49 1826.62,894.49 X34.8
D7: X34.10 X40.2 | length 3954.4
  Digital Layer w10: X40.2 478,2179.11 537.62,2119.49 537.62,240.49 684.15,93.96 1631.09,93.96 1765.62,228.49 1765.62,644.49 1815.62,694.49 X34.10
D8: X14.8 X34.11 X46.4 | length 3580.4
  nMO Layer w10: X46.4 1229,3422.37 1310,3341.37 1310,1324.37 1373.88,1260.49 X14.8
  GND Layer w10: X14.8 1694.62,1260.49 1747.62,1207.49 1747.62,644.49 1797.62,594.49 X34.11
D9: X8.8 X34.12 X46.2 | length 3853
  nMO Layer w10: X46.2 1196,3622.37 1411,3407.37 1411,2312.37 1452.88,2270.49 X8.8
  GND Layer w10: X8.8 1527.62,2270.49 1503.62,2246.49 1503.62,1210.49 1700.62,1013.49 1700.62,560.49 1766.62,494.49 X34.12
D10: X8.7 X34.13 X46.1 | length 4087.8
  nMO Layer w10: X46.1 1181,3722.37 1461,3442.37 1461,2418.37 1508.88,2370.49 X8.7
  GND Layer w10: X8.7 1504.62,2370.49 1461.62,2327.49 1461.62,1199.49 1650.62,1010.49 1650.62,462.49 1718.62,394.49 X34.13
D11: X22.7 X34.14 X46.5 | length 3789.2
  nMO Layer w10: X46.5 1212,3322.37 1267,3267.37 1267,472.37 1393.88,345.49 X22.7
  GND Layer w10: X22.7 1697.62,345.49 1748.62,294.49 X34.14
D12: X22.8 X34.15 X46.6 | length 3831.9
  nMO Layer w10: X46.6 1180,3222.37 1242.09,3160.28 1242.09,292.28 1265,269.37 1490,269.37 1513.88,245.49 X22.8
  GND Layer w10: X22.8 1702.62,245.49 1753.62,194.49 X34.15
D13: X23.8 X34.16 X46.14 | length 4906.1
  Digital Layer w10: X34.16 2473.62,115.75 2504,85.37 3638,85.37 3666.62,113.99 X23.8
  MO Layer w10: X46.14 1188,2422.37 1883,1727.37 2512,1727.37 2576,1663.37 2576,206.49 2564,194.49 X34.16
d_00: X4.4 X4.17 X7.12 | length 328.3
  GND Layer w10: X4.17 1901.87,4561.74 1888.62,4548.49 1858.62,4548.49 1847.52,4537.39 1847.52,4446.59 1913.14,4380.97 1913.14,4352.97 X7.12
d_0: R10.1 R10.2 X7.11 X18.1 X46.29 | length 9254.3
  Digital Layer w10: X18.1 R10.2 R10.1 1437,513.37 1522,598.37 1522,1975.87 1920.62,2374.49 X7.11
  nMO Layer w10: X7.11 1920.62,4201.99 1720.22,4001.59 1720.22,2700.15 2296,2124.37 3151.37,2124.37 3243.15,2032.59 3382.85,2032.59 3445.78,2095.52 3445.78,3190.59 3414,3222.37 X46.29
dp: R2.3 X1.15 X5.2 | length 2892.6
  Digital Layer w10: X1.15 812.77,3882.6 848,3847.37 848,1635.37 1070,1413.37 R2.3 X5.2
dp_00: X4.2 X7.4 | length 228.3
  GND Layer w10: X7.4 1520.62,4395.49 1544.62,4419.49 1607.62,4419.49 1630.12,4441.98 X4.2
dp_0: R2.1 R2.2 X5.1 X7.3 X46.18 | length 7761.8
  Digital Layer w10: X5.1 R2.2 R2.1 975,1549.37 876.62,1647.75 876.62,3847.99 910.23,3881.6 1263.73,3881.6 1520.62,4138.49 X7.3
  MO Layer w10: X7.3 1520.62,4161.75 1551,4131.37 3406,4131.37 3463,4074.37 3463,2169.37 3416,2122.37 X46.18
e: R12.3 X22.15 X24.2 | length 860.9
  Digital Layer w10: X22.15 710.88,846.49 732,825.37 732,680.37 956,456.37 956,381.37 1026,311.37 R12.3 X24.2
e_00: X4.5 X4.18 X7.14 | length 347.5
  GND Layer w10: X4.18 2010.57,4559.44 1999.62,4548.49 1967.62,4548.49 1956.22,4537.09 1956.22,4430.89 1975.62,4411.49 2012.62,4411.49 2020.62,4403.49 X7.14
e_0: R12.1 R12.2 X7.13 X24.1 X46.28 | length 9758.3
  Digital Layer w10: R12.1 R12.2 X24.1 1213,208.37 1267,154.37 1583,154.37 1652.62,223.99 1652.62,2006.49 2020.62,2374.49 X7.13
  nMO Layer w10: X7.13 2020.62,4198.99 1744,3922.37 1744,2710.74 2306.37,2148.37 3161,2148.37 3253,2056.37 3373,2056.37 3422,2105.37 3422,3099.37 3399,3122.37 X46.28
f: R14.3 X22.10 X28.2 | length 261.1
  Digital Layer w10: X22.10 773.88,346.49 R14.3 X28.2
f_00: X4.6 X4.19 X7.16 | length 325.7
  GND Layer w10: X4.19 2119.27,4556.14 2110.62,4547.49 2072.62,4547.49 2064.92,4539.79 X4.6 2064.92,4444.19 2120.62,4388.49 X7.16
f_0: R14.1 R14.2 X7.15 X28.1 X46.27 | length 9814.4
  Digital Layer w10: R14.1 R14.2 X28.1 971,210.37 1056,125.37 1605,125.37 1699.62,219.99 1699.62,1999.49 2121.62,2421.49 X7.15@2121.62,4245.49
  nMO Layer w10: X7.15 2120.62,4205.99 1769,3854.37 1769,2719.37 2314.31,2174.06 3358.11,2174.06 3398,2213.95 3398,3007.37 3383,3022.37 X46.27
g: R1.3 X2.15 X3.2 | length 3677.4
  Digital Layer w10: X3.2 R1.3
  GND Layer w10: X2.15 2938.62,3881.49 3248.74,3571.37 3377,3571.37 3418,3530.37 3712,3530.37 3782.59,3459.78 3782.59,2217.07 3224,1658.48 3224,1472.37 3289,1407.37 R1.3
g_00: X4.13 X7.32 | length 211.5
  GND Layer w10: X4.13 2870.54,4491.57 2920.62,4441.49 X7.32
g_0: R1.1 R1.2 X3.1 X7.31 X46.26 | length 5017.9
  Digital Layer w10: X7.31 3205.62,4245.49 3289,4162.11 R1.1 R1.2 X3.1
  nMO Layer w10: X7.31 2920.62,4200.75 3029,4092.37 3029,2955.37 3062,2922.37 X46.26
GND: X1.6 X1.11 X1.12 X2.12 X4.26 X4.27 X8.12 X9.12 X14.12 X15.12 X20.4 X20.5 X20.6 X21.2 X22.12 X23.12 X30.1 X30.2 X31.1 X31.2 X34.4 X34.29 X35.1 X35.2 X36.2 X36.10 X36.11 X39.1 X39.2 X40.4 X43.1 X43.2 X46.17
h: R3.3 X2.10 X6.2 | length 3492.3
  Digital Layer w10: X6.2 R3.3
  GND Layer w10: X2.10 2916.88,3381.49 2926,3372.37 3446,3372.37 3505.12,3431.49 3689.88,3431.49 3747,3374.37 3747,2233.37 3088,1574.37 3088,1366.37 3071,1349.37 R3.3
h_00: X4.25 X7.30 | length 278.2
  GND Layer w10: X4.25 2771.48,4438.63 2820.62,4389.49 X7.30
h_0: R3.1 R3.2 X6.1 X7.29 X46.25 | length 5602
  Digital Layer w10: X7.29 2820.62,4280.75 2806,4295.37 2589,4295.37 2571,4277.37 2571,2761.37 2571,2684.37 2635,2620.37 2990,2620.37 3034,2576.37 R3.1 R3.2 X6.1
  nMO Layer w10: X7.29 2820.62,4196.75 2964,4053.37 2964,2865.37 3007,2822.37 X46.25
j: R5.3 X9.15 X11.2 | length 2671.8
  Digital Layer w10: X9.15 3170.13,2871.24 3209,2832.37 3209,2803.37 3209,1129.37 3415,923.37 R5.3 X11.2
j_00: X4.12 X7.28 | length 147.5
  GND Layer w10: X4.12 2717.13,4421.98 2720.62,4418.49 X7.28
j_0: R5.1 R5.2 X7.27 X11.1 X46.24 | length 6216.7
  Digital Layer w10: X7.27 2720.62,4099.49 3237,3583.11 3237,1148.37 3363,1022.37 R5.1 R5.2 X11.1
  nMO Layer w10: X7.27 2720.62,4197.99 2489,3966.37 2489,2956.37 2723,2722.37 X46.24
k: R7.3 X9.10 X13.2 | length 1872.1
  Digital Layer w10: X9.10 2799.13,2371.24 2819,2351.37 2819,1388 3109.78,1097.22 3109.78,834.59 3122,822.37 R7.3 X13.2
k_00: X4.11 X4.24 X7.26 | length 303
  GND Layer w10: X7.26 2620.62,4412.49 2608.43,4424.68 X4.11 2608.43,4534.29 2621.62,4547.49 2651.62,4547.49 2662.78,4558.64 X4.24
k_0: R7.1 R7.2 X7.25 X13.1 X46.23 | length 6509
  Digital Layer w10: X7.25 2620.62,2797.75 2698.83,2719.54 3132.83,2719.54 3182.31,2670.06 3182.31,1209.06 3161,1187.76 R7.1 R7.2 X13.1
  nMO Layer w10: X7.25 2620.62,4184.99 2464,4028.37 2464,2820.99 2662.62,2622.37 X46.23
l: R9.3 X15.15 X17.2 | length 1836.8
  Digital Layer w10: X15.15 2680.87,1861.24 2651,1831.37 2651,1341.37 2682.83,1309.54 2824.83,1309.54 3061,1073.37 3061,682.37 3030.56,651.93 2933.31,651.93 2909,676.24 X17.2 R9.3
l_00: X4.10 X4.23 X7.24 | length 307.2
  GND Layer w10: X7.24 2520.62,4403.49 2499.72,4424.39 X4.10 2499.72,4533.59 2513.62,4547.49 2544.62,4547.49 2554.08,4556.94 X4.23
l_0: R9.1 R9.2 X7.23 X17.1 X46.22 | length 6329.7
  Digital Layer w10: X7.23 2520.62,1871.75 2623,1769.37 2623,1251.37 2852,1022.37 R9.1 R9.2 X17.1
  nMO Layer w10: X7.23 2520.62,4156.99 2440,4076.37 2440,2670.37 2588,2522.37 X46.22
m: R11.3 X15.10 X19.2 | length 2037
  Digital Layer w10: X15.10 2812.13,1361.24 3086,1087.37 3086,699.37 3227,558.37 3470,558.37 3573,455.37 3573,168.37 3546,141.37 3439,141.37 3415,165.37 X19.2 R11.3
m_00: X4.9 X4.22 X7.22 | length 311.4
  GND Layer w10: X7.22 2420.62,4401.49 2391.02,4431.09 X4.9 2391.02,4535.89 2402.62,4547.49 2434.62,4547.49 2445.37,4558.24 X4.22
m_0: R11.1 R11.2 X7.21 X19.1 X46.21 | length 7914.9
  Digital Layer w10: X7.21 2420.62,1916.49 2597,1740.11 2597,1240.37 2853.62,983.75 2853.62,653.38 2878.85,628.15 3119.22,628.15 3234,513.37 R11.1 R11.2 X19.1
  nMO Layer w10: X7.21 2420.62,4200.99 1843,3623.37 1843,3067.37 2488,2422.37 X46.21
MO: X1.10 X1.14 X2.9 X2.14 X8.9 X8.14 X9.9 X9.14 X14.9 X14.14 X15.9 X15.14 X22.9 X22.14 X23.9 X23.14 | length 595.7
  nMO Layer w20: X1.10 573.43,3382.6 543.62,3412.4 543.62,3738.99 587.23,3782.6 X1.14
MX_OUT: X45.3 X46.34 | length 4554.7
  GND Layer w20: X45.3 322,4270.37 356,4304.37 356,4565.37 419,4628.37 1071,4628.37 1280,4837.37 3271,4837.37 3338.1,4770.27 X46.34
n: R13.3 X23.15 X25.2 | length 890
  Digital Layer w10: X23.15 2790.13,846.24 2804,832.37 2804,635.74 2859.37,580.37 2967,580.37 3161,386.37 R13.3 X25.2
n_00: X4.8 X4.21 X7.20 | length 316.2
  GND Layer w10: X7.20 2320.62,4391.49 2282.32,4429.79 X4.8 2282.32,4531.19 2295.62,4544.49 2329.62,4544.49 2336.67,4551.54 X4.21
n_0: R13.1 R13.2 X7.19 X25.1 X46.20 | length 7860.5
  Digital Layer w10: X7.19 2320.62,1947.49 2570,1698.11 2570,1231.37 2829,972.37 2829,644.37 2869,604.37 2992,604.37 3083,513.37 R13.1 R13.2 X25.1
  nMO Layer w10: X7.19 2320.62,4204.99 1818,3702.37 1818,2891.37 2387,2322.37 X46.20
p: R15.3 X23.10 X29.2 | length 272.6
  Digital Layer w10: X23.10@2753.25,346.86 2875.51,346.86 R15.3 X29.2
p_00: X4.7 X4.20 X7.18 | length 318.6
  GND Layer w10: X7.18 2220.62,4392.49 2173.62,4439.49 2173.62,4536.49 2184.62,4547.49 2216.62,4547.49 2227.97,4558.84 X4.20
p_0: R15.1 R15.2 X7.17 X29.1 X46.19 | length 8019.8
  Digital Layer w10: X7.17 2220.62,3242.49 2220.62,1979.49 2542,1658.11 2542,546.37 2593,495.37 2831,495.37 2849,513.37 R15.1 R15.2 X29.1
  nMO Layer w10: X7.17 2220.62,4204.99 1794,3778.37 1794,2728.37 2300,2222.37 X46.19
V_LED: X1.4 X1.9 X20.2 | length 2474.3
  nMO Layer w20: X20.2 106.08,3709.44 73,3676.37 73,3381.37 171.77,3282.6 X1.9 741.23,3282.6 798,3339.37 798,3741.37 870,3813.37 1186.96,3813.37 1318.73,3681.6 X1.4
V_MB: X1.13 X2.13 X8.13 X9.13 X14.13 X15.13 X20.1 X22.13 X23.13 X44.1 X46.16 | length 12396.1
  MO Layer w20: X20.1 183.8,3955.17 222,3993.37 490,3993.37 538,3945.37 538,3725.37 580.77,3682.6 X1.13 ; X22.13 742,725.87 742,1582.11 X14.13 ; X46.16 918,2222.37 878,2182.37 878,1703.37 836.12,1661.49 X14.13 ; X44.1 2295,725.37 2334,686.37 2334,171.37 2377,128.37 2607,128.37 2653,174.37 2653,546.61 X23.13 2659,739.86 2659,1567.61 X15.13 2658,1755.86 2658,2577.61 X9.13 ; X2.13 2652,3581.87 2652,2770.86 X9.13 ; X14.13 768,1766.87 768,2566.11 X8.13 784,2792.87 784,3561.58 X1.13 ; X1.13 762.98,3782.6 1061.77,3782.6 1401,3443.37 1401,3305.48 1629.11,3077.37 2035,3077.37 2441.13,2671.24 X9.13
V_MB_ruler: X36.7 X44.2 | length 3201.8
  MO Layer w20: X36.7 237.02,911.89 209.62,884.49 209.62,386.49 301.62,294.49 465.62,294.49 633.74,126.37 2000,126.37 2046,172.37 2046,697.37 2074,725.37 X44.2
V_RESERVE: X20.3 X21.1 | length 1504.6
  GND Layer w20: X20.3 99.97,3543.4 66,3577.37 66,4573.37 211.12,4718.49 X21.1
pads on no net: X1.1 X1.2 X1.3 X2.1 X2.2 X2.3 X2.4 X2.5 X2.6 X8.1 X8.2 X8.3 X8.4 X8.5 X8.6 X9.1 X9.2 X9.3 X9.4 X9.5 X9.6 X14.1 X14.2 X14.3 X14.4 X14.5 X14.6 X15.1 X15.2 X15.3 X15.4 X15.5 X15.6 X22.1 X22.2 X22.3 X22.4 X22.5 X22.6 X23.1 X23.2 X23.3 X23.4 X23.5 X23.6 X26.3 X26.4 X34.1 X34.2 X34.3 X34.9 X34.17 X34.18 X34.25 X34.26 X34.27 X34.28 X34.30 X36.1 X36.3 X36.4 X36.5 X36.9 X40.1 X40.5 X40.6 X40.7 X40.8 X45.2

## Polygon pours and split planes (outlines as drawn)
GND on GND Layer "NONET_L02_P-001" (hatched 90Degree grid 20 track 8, remove dead copper, pour order 14): 39.37,4881.89 4094.49,4881.89 4094.49,39.37 39.37,39.37
MO on MO Layer "NONET_L02_P-001" (hatched 90Degree grid 20 track 8, remove dead copper, pour order 12): 39.37,4881.89 4094.49,4881.89 4094.49,39.37 39.37,39.37
\M\O\ on nMO Layer "NONET_L02_P-001" (hatched 90Degree grid 20 track 8, remove dead copper, pour order 8): 39.37,4881.89 4055.12,4881.89 4055.12,39.37 39.37,39.37

## Other copper
Digital Layer:
  pour cut-out: 0,0 0,236.22 236.22,236.22 236.22,0
  pour cut-out: 4133.86,4921.26 3897.64,4921.26 3897.64,4685.04 4133.86,4685.04
  pour cut-out: 0,4921.26 236.22,4921.26 236.22,4685.04 0,4685.04
  pour cut-out: 4133.86,0 4133.86,236.22 3897.64,236.22 3897.64,0
nMO Layer:
  pour cut-out: 3897.64,236.22 4133.86,236.22 4133.86,0 3897.64,0
  pour cut-out: 0,236.22 236.22,236.22 236.22,0 0,0
  pour cut-out: 4133.86,4921.26 3897.64,4921.26 3897.64,4685.04 4133.86,4685.04
  pour cut-out: 0,4921.26 236.22,4921.26 236.22,4685.04 0,4685.04
MO Layer:
  pour cut-out: 0,236.22 236.22,236.22 236.22,0 0,0
  pour cut-out: 3897.64,236.22 4133.86,236.22 4133.86,0 3897.64,0
  pour cut-out: 3897.64,4921.26 4133.86,4921.26 4133.86,4685.04 3897.64,4685.04
  pour cut-out: 0,4921.26 236.22,4921.26 236.22,4685.04 0,4685.04
GND Layer:
  pour cut-out: 3897.64,236.22 4133.86,236.22 4133.86,0 3897.64,0
  pour cut-out: 0,236.22 236.22,236.22 236.22,0 0,0
  pour cut-out: 0,4921.26 236.22,4921.26 236.22,4685.04 0,4685.04
  pour cut-out: 3897.64,4921.26 4133.86,4921.26 4133.86,4685.04 3897.64,4685.04

## Silkscreen, mask and mechanical layers (free items; w line width, h text height)
Top Overlay:
  drawing of 34 lines, arcs and shapes, not listed
  text "V_RESERVE" at 284,4803.37 h40
  text "15" at 3292.12,4716.49 h60
  text "+" at 3644.12,4715.49 h60
  text "2" at 3704.12,4715.49 h60
  text "GND" at 601,4668.37 h40 r90
  text "To LED" at 1104,4433.37 h60 r90
  text "OPTO" at 3177,4328.37 h60
  text "MSPat" at 3659,4328.37 h60
  text "nMO" at 1350.62,4217.49 h60 r90
  text "dp" at 1466.62,4118.49 h60
  text "a" at 1596.62,4118.49 h60
  text "b" at 1701.62,4118.49 h60
  text "c" at 1798.66,4118.49 h60
  text "d" at 1898.66,4118.49 h60
  text "e" at 2002.66,4118.49 h60
  text "f" at 2111.62,4118.49 h60
  text "p" at 2200.62,4118.49 h60
  text "n" at 2299.62,4118.49 h60
  text "m" at 2400.62,4118.49 h60
  text "L" at 2503.62,4118.49 h60
  text "j" at 2700.62,4118.49 h60
  text "h" at 2800.62,4118.49 h60
  text "g" at 2900.62,4118.49 h60
  text "k" at 2600.62,4117.49 h60
  text "LEDS + rulers /  controller" at 3169,4103.37 h60
  text "Amp / shunt" at 74.09,2550.37 h60
  text "Digital Ruler" at 531,1786.37 h60 r90
  text "g" at 3320,1132.37 h60
  text "dp" at 1071,1109.37 h60
  text "h" at 3063,1108.37 h60
  text "Optical Ruler" at 567.62,597.49 h60 r90
  text "c" at 837,593.37 h60
  text "b" at 1101,593.37 h60
  text "a" at 1359,593.37 h60
  text "j" at 3448,591.37 h60
  text "L" at 2937,590.37 h60
  text "k" at 3195,590.37 h60
  text "p" at 2929,98.37 h60
  text "m" at 3441,98.37 h60
  text "n" at 3189,96.37 h60
  text "f" at 846,76.37 h60
  text "d" at 1365,76.37 h60
  text "e" at 1099,74.37 h60
Bottom Overlay:
  lines w10: 2308,725.37 2335,698.37 2362,725.37 ; 2335.61,331.48 ccw(c2335.61,373.49) 2377.62,373.49 2377.62,679.49 cw(c2419.63,679.49) 2419.63,721.5 cw(c2419.62,763.5) 2377.61,763.5 ; 2335.62,1022.5 cw(c2335.62,980.49) 2377.63,980.49 ; 2377.62,765.54 2377.62,979.49
  text "g" at 2644.62,3864.49 h60
  text "d / p" at 565.98,3793.6 h60
  text "nMO" at 1884,3442.37 h60
  text "2" at 1755,3357.37 h60
  text "h" at 2644.62,3355.49 h60
  text "A1" at 3870.63,3346.49 h60
  text "MO" at 565.98,3344.37 h60
  text "3" at 1755,3252.37 h60
  text "4" at 3830.64,3248.49 h60
  text "a" at 555.62,2851.49 h60
  text "j" at 2644.62,2847.24 h60
  text "k" at 2644.62,2351.24 h60
  text "b" at 555.62,2349.49 h60
  text "10" at 1804.61,2340.49 h60
  text "A5" at 3890.62,2337.49 h60
  text "9" at 1754.62,2240.49 h60
  text "A4" at 3890.62,2239.49 h60
  text "c" at 555.62,1842.49 h60
  text "L" at 2645.62,1838.24 h60
  text "LED" at 2256,1616.37 h60
  text "d" at 555.62,1339.49 h60
  text "m" at 2645.62,1336.24 h60
  text "5" at 1754.62,1331.49 h60
  text "A3" at 3890.62,1328.49 h60
  text "8" at 1754.62,1232.49 h60
  text "A2" at 3890.62,1230.49 h60
  text "Optical /  Ruler" at 2365,1035.37 h60
  text "e" at 555.62,827.49 h60
  text "n" at 2645.62,826.24 h60
  text "Digital /  Ruler" at 2361,461.37 h60
  text "p" at 2645.62,327.24 h60
  text "f" at 555.62,316.49 h60
  text "11" at 1784.61,315.49 h60
  text "A0" at 3890.62,314.49 h60
  text "12" at 1804.61,215.49 h60
  text "13" at 3880.63,214.49 h60
Mechanical 1:
  circle w10: c4015.75,118.11 r78.74
  circle w10: c118.11,118.11 r78.74
  circle w10: c4015.75,4803.15 r78.74
  circle w10: c118.11,4803.15 r78.74
  lines w10: 0,0 0,4921.26 4133.86,4921.26 4133.86,0 0,0

## Text inside footprints (layer, text, board x,y; h text height)
X46: Top Overlay "MX / OUT" at 3316.51,3659.36 h60; Top Overlay "b" at 3417.71,3391.59 h60; Top Overlay "c" at 3417.71,3301.59 h60; Top Overlay "d" at 3417.71,3191.59 h60; Top Overlay "e" at 3417.71,3101.59 h60; Top Overlay "f" at 3417.71,2991.59 h60; Top Overlay "g" at 3417.71,2911.59 h60; Top Overlay "h" at 3417.71,2791.59 h60; Top Overlay "j" at 3417.71,2701.59 h60; Top Overlay "k" at 3417.71,2591.59 h60; Top Overlay "L" at 3417.71,2491.59 h60; Top Overlay "m" at 3417.71,2401.59 h60; Top Overlay "n" at 3417.71,2301.59 h60; Top Overlay "p" at 3417.71,2211.59 h60; Top Overlay "dp" at 3417.71,2101.59 h60; Top Overlay "+5V" at 737.59,2192.38 h60; Top Overlay "GND" at 737.59,2092.38 h60; Top Overlay "a" at 3417.71,3501.59 h60; Top Overlay "D1" at 747.68,3692.38 h60; Top Overlay "D2" at 747.68,3592.38 h60; Top Overlay "D3" at 747.68,3492.38 h60; Top Overlay "D4" at 747.68,3392.38 h60; Top Overlay "D5" at 747.68,3292.38 h60; Top Overlay "D6" at 747.68,3192.38 h60; Top Overlay "D7" at 747.68,3092.38 h60; Top Overlay "D8" at 747.68,2992.38 h60; Top Overlay "D9" at 747.68,2892.38 h60; Top Overlay "D11" at 747.68,2692.38 h60; Top Overlay "D10" at 747.68,2792.38 h60; Top Overlay "D12" at 747.68,2592.38 h60; Top Overlay "D13" at 747.68,2492.38 h60; Top Overlay "D14" at 747.68,2392.38 h60; Top Overlay "D15" at 747.68,2292.38 h60; Top Overlay "nMO" at 3417.87,3589.03 h60